# Altium PCB PCB_Germany-M8N_2022-05-04.pcbdoc
Units mil, origin at the board's own origin, x right, y up, seen from the top; angles counter-clockwise.
Board outline 5620 x 3530 mil, 2 copper layers (Top Layer, Bottom Layer); 49 components, 38 nets, 259 pads, 95 vias.
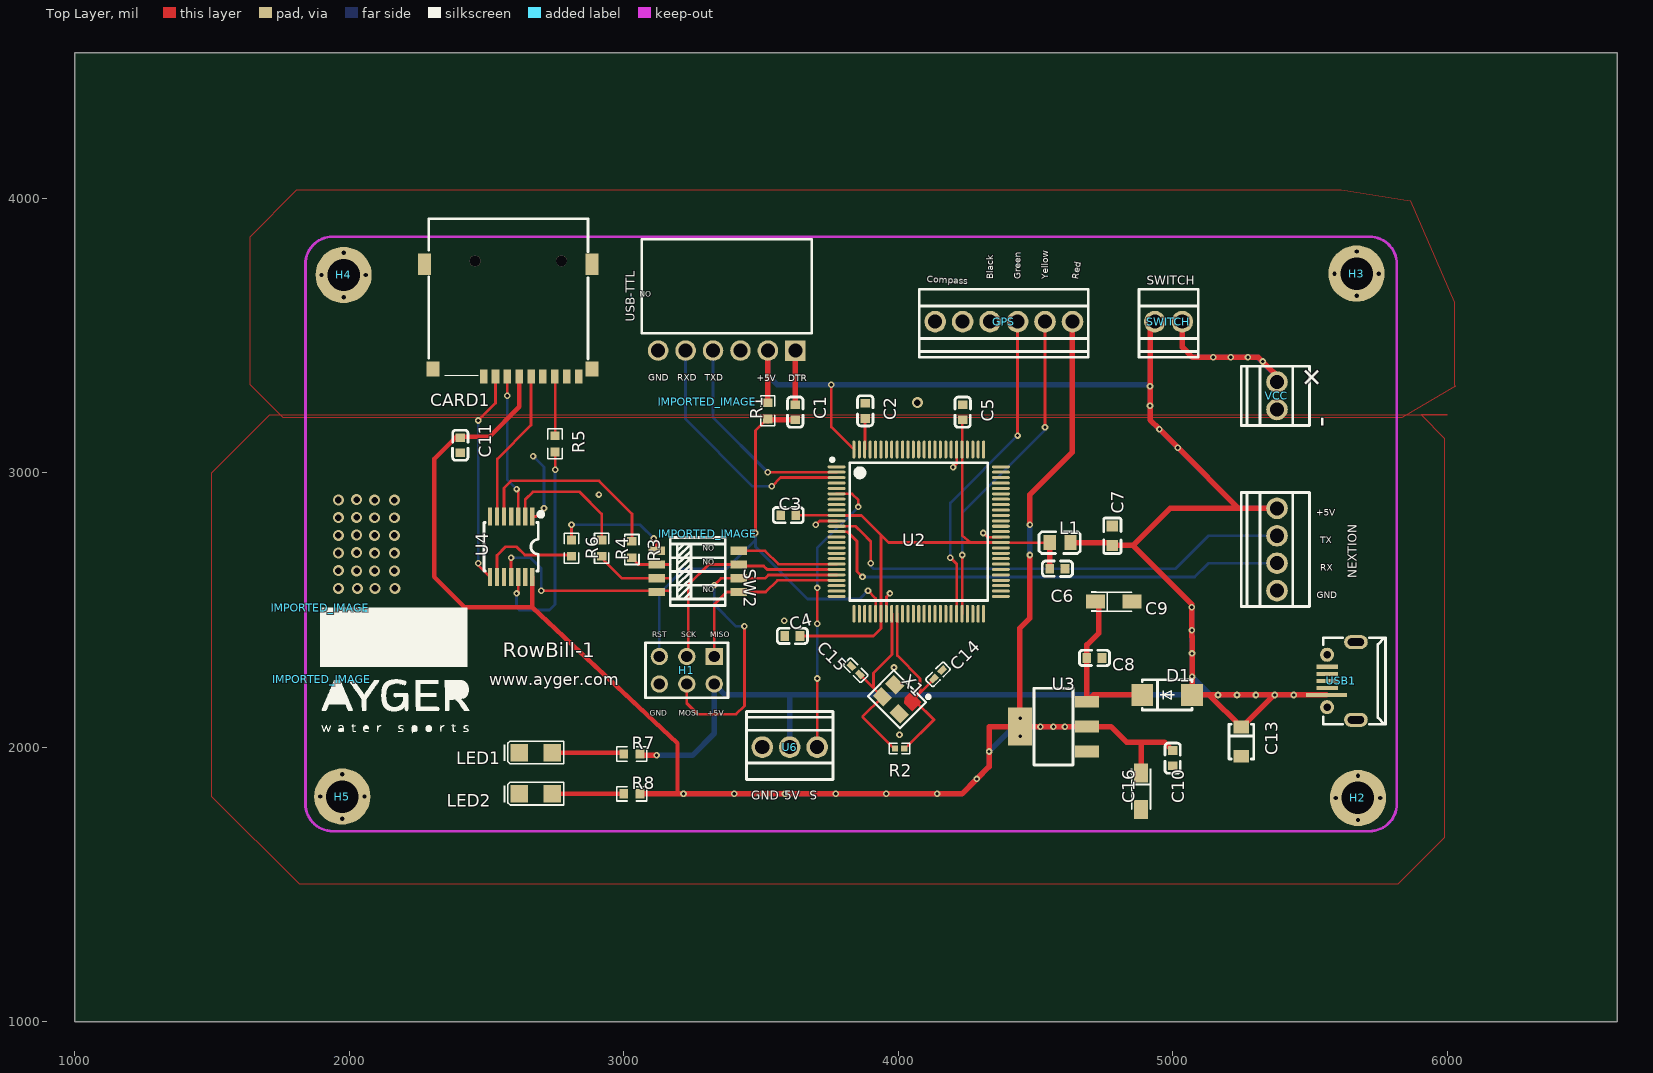
[diagram p0: Top Layer view]
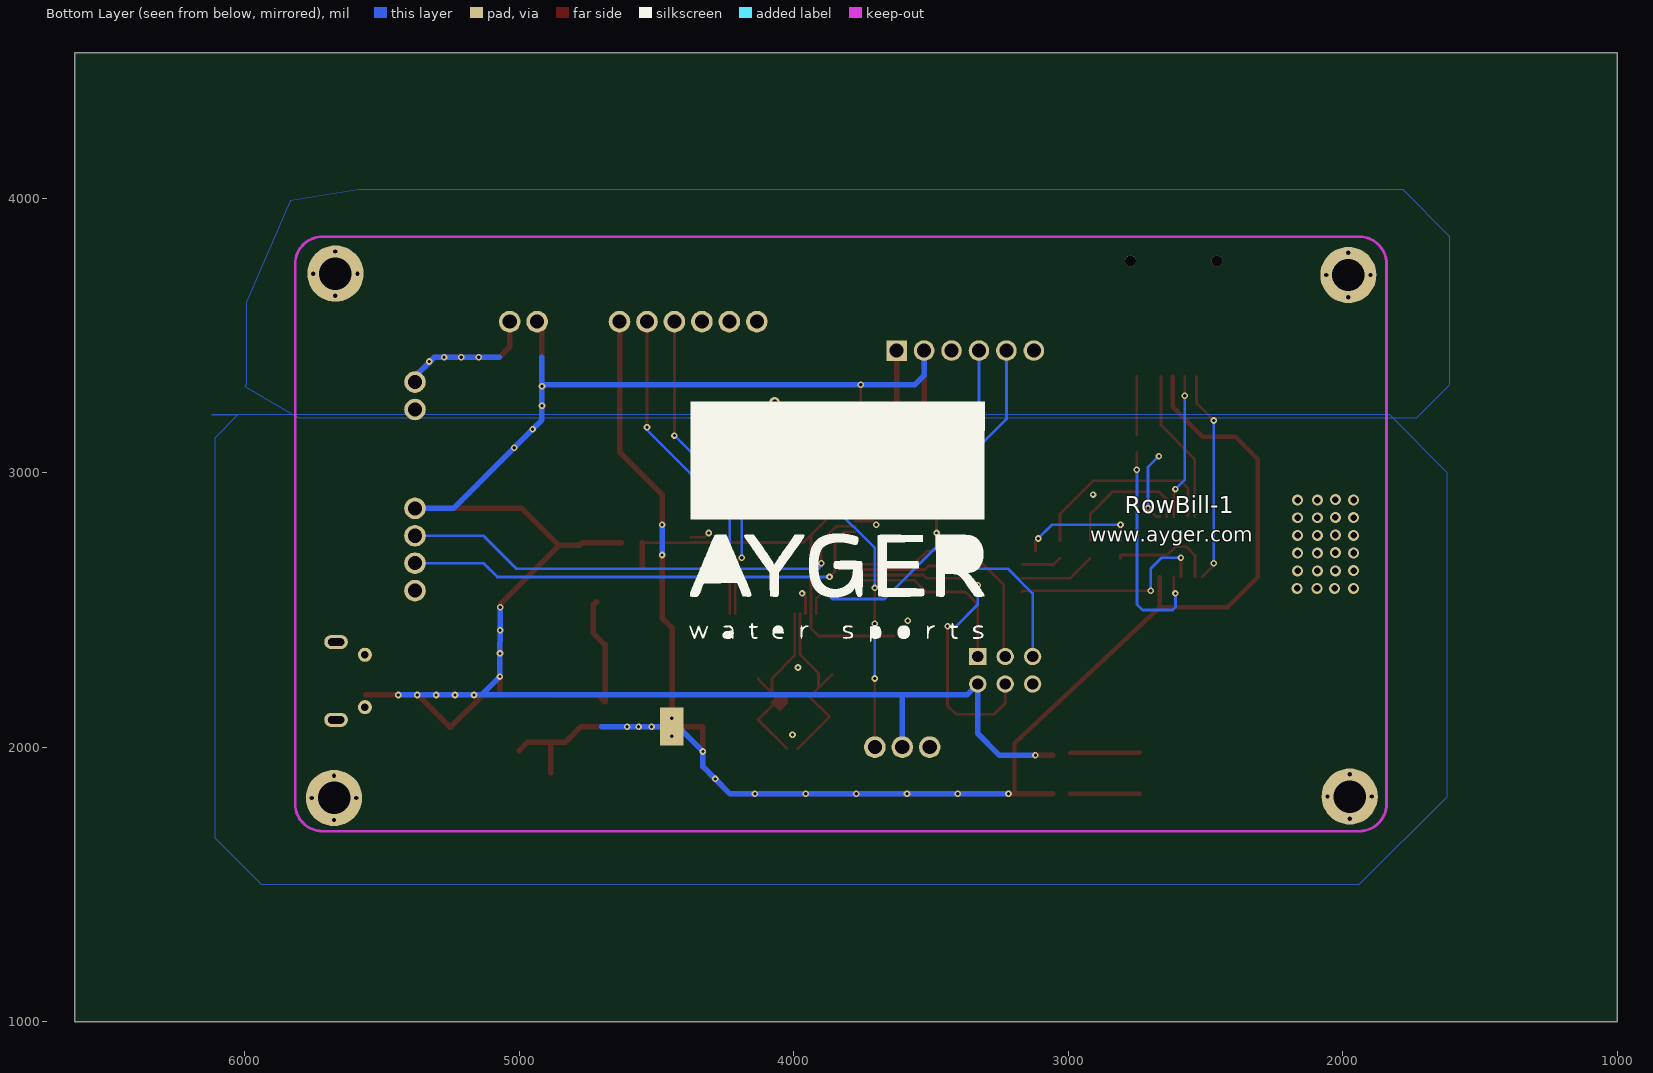
[diagram p1: Bottom Layer view, seen from below]

## Layer stack, top to bottom
Top Layer: signal copper (thickness not stored)
Dielectric: dielectric 12.6, FR-4, Dk 4.8
Bottom Layer: signal copper (thickness not stored)

## Board outline
6620,1000 1000,1000 1000,4530 6620,4530

## Components (designator, comment, footprint, x,y, rotation, side; value= is the part's Value field where it differs from the comment)
C1 "100nF" C0603#1 3625,3220 r270 top
C2 "100nF" C0603#1 3880,3225 r270 top
C3 "100nF" C0603#1 3600,2845 r0 top
C4 "100nF" C0603#1 3615,2405 r0 top
C5 "100nF" C0603#1 4235,3220 r270 top
C6 "100nF" C0603#1 4580,2650 r180 top
C7 "10u" C0603#2 4780,2770 r270 top
C8 "100nF" C0603#1 4715,2325 r180 top
C9 "10uF" CAP-SMD_L3.2-W1.6-R-RD 4785,2530 r180 top
C10 "100nF" C0603#1 5000,1960 r90 top
C11 "100nF" C0603#1 2405,3100 r90 top
C13 "1uF" CAP-SMD_L3.2-W1.6 5250,2020 r270 top
C14 "22pF" C0402 4145,2265 r225 top
C15 "22pF" C0402 3845,2280 r315 top
C16 "22uF" CAP-SMD_L3.2-W1.6-R-RD 4885,1840 r90 top
CARD1 "TF-01A" TF-SMD_TF-01A 2580,3554.97 r180 top
D1 "M7_C95872" DO-214AC_L4.3-W2.7-LS5.3-RD 4980,2190 r0 top
GPS "KF128-2.54-6P" CONN-TH_6P-P2.54_KF128-2.54-6P 4385,3550 r0 top
H1 "A2541WV-2X3P" HDR-TH_6P-P2.54-V-R2-C3-S2.54_A2541WV-2X3P 3230,2280 r180 top
H2 "SCREW HOLE 3MM" ? 5675,1815 r0 top
H3 "SCREW HOLE 3MM" ? 5670,3725 r0 top
H4 "SCREW HOLE 3MM" ? 1980,3720 r0 top
H5 "SCREW HOLE 3MM" ? 1975,1820 r0 top
IMPORTED_IMAGE "IMPORTED_IMAGE" IMPORTED_IMAGE 3305.95,2778.15 r0 top
IMPORTED_IMAGE "IMPORTED_IMAGE" IMPORTED_IMAGE 3305,3259 r0 top
IMPORTED_IMAGE "IMPORTED_IMAGE" IMPORTED_IMAGE 1895,2507.25 r0 top
IMPORTED_IMAGE "IMPORTED_IMAGE" IMPORTED_IMAGE 1900.1,2246.4 r0 top
L1 "BLM21PG220SH1D" L0805 4590,2745 r0 top
LED1 "led Green" LED1206-RD 2680,1980 r0 top
LED2 "led Green" LED1206-RD 2680,1830 r0 top
NEXTION "KF128-2.54-4P" CONN-TH_4P-P2.54_KF128-2.54-4P 5380,2720 r270 top
R1 "10K" R0603 3525,3225 r90 top
R2 "1M" R0402 4005,1995 r180 top
R3 "3.3K" R0603 3030,2720 r270 top
R4 "3.3K" R0603 2920,2725 r270 top
R5 "3.3K" R0603 2750,3105 r270 top
R6 "3.3K" R0603 2810,2725 r270 top
R7 "1K" R0603 3030,1975 r0 top
R8 "1K" R0603 3030,1830 r0 top
SW2 "DHA-04TQ" SW-SMD_8P-L6.3-W4.5-P1.27-LS8.1 3270,2640 r270 top
SWITCH "KF128-2.54-2P" CONN-TH_P2.54_KF128-2.54-2P 4985,3550 r0 top
U2 "ATMEGA2560-16AU" TQFP-100_L14.0-W14.0-P0.50-LS16.0-BL 4075,2785 r270 top
U3 "AMS1117-3.3_C369933" SOT-223_L6.7-W3.5-P2.30-BR 4565.63,2074.72 r0 top
U4 "74LVC125APW,118" TSSOP-14_L5.0-W4.4-P0.65-LS6.4-BL 2590,2730 r180 top
U6 "KF128-2.54-3P" CONN-TH_3P-P2.54_KF128-2.54-3P 3605,2000 r180 top
USB1 "MICROXNJ" MICRO-USB-SMD_MICROXNJ 5615,2241.1 r90 top
USB-TTL "A2541HWR-6P" HDR-TH_6P-P2.54-H-W8.6_A2541HWR-6P 3375.6,3444.7 r180 top
VCC "KF128-2.54-2P" CONN-TH_P2.54_KF128-2.54-2P 5380,3280 r270 top
X1 "16MHz" OSC-SMD_4P-L3.2-W2.5-BL 3995.62,2174.71 r135 top

## Footprints (in the part's own frame and the unit in brackets; to place one, negate y for a bottom-side part, rotate by r counter-clockwise, add the part's x,y. Pads: shape width x height; smd on the part's side, far side on the other; paste and mask are expansions set on the pad)
C0402 [mm]
  rect 0.79x0.54 smd: 1(-0.545,0) 2(0.545,0)
  silkscreen extent -1.17,-0.5 1.17,0.5
C0603#1 [mm]
  rect 0.8x0.9 smd: 1(-0.7,0) 2(0.7,0)
  silkscreen extent -1.41,-0.71 1.39,0.72
C0603#2 [mm]
  rect 1x1.1 smd: 1(-0.9,0) 2(0.9,0)
  silkscreen extent -1.65,-0.8 1.65,0.8
CAP-SMD_L3.2-W1.6 [mm]
  rect 1.2x1.4 smd: 1(-1.35,0) 2(1.35,0)
  silkscreen extent -1.6,-1.14 1.6,1.14
CAP-SMD_L3.2-W1.6-R-RD [mil]
  rect 69.19x51.02 smd: 1(66.39,0) 2(-66.39,0)
  silkscreen extent -66,-37 81,37
CONN-TH_3P-P2.54_KF128-2.54-3P [mm]
  round 2 hole 1.3: 1(-2.54,0) 2(0,0) 3(2.54,0)
  silkscreen extent -4.01,-3.3 4.01,3
CONN-TH_4P-P2.54_KF128-2.54-4P [mm]
  round 2 hole 1.3: 1(-3.81,0) 2(-1.27,0) 3(1.27,0) 4(3.81,0)
  silkscreen extent -5.28,-3.3 5.28,3
CONN-TH_6P-P2.54_KF128-2.54-6P [mm]
  round 2 hole 1.3: 1(-6.35,0) 2(-3.81,0) 3(-1.27,0) 4(1.27,0) 5(3.81,0) 6(6.35,0)
  silkscreen extent -7.82,-3.3 7.82,3
CONN-TH_P2.54_KF128-2.54-2P [mm]
  round 2 hole 1.3: 1(-1.27,0) 2(1.27,0)
  silkscreen extent -2.74,-3.3 2.74,3
DO-214AC_L4.3-W2.7-LS5.3-RD [mm]
  rect 2x2 smd: 1(-2.3,0) 2(2.3,0)
  silkscreen extent -2.3,-1.4 2.3,1.4
HDR-TH_6P-P2.54-H-W8.6_A2541HWR-6P [mm]
  rect 1.9x1.9 hole 1.3: 1(-6.35,0)
  round 1.9 hole 1.3: 2(-3.81,0) 3(-1.27,0) 4(1.27,0) 5(3.81,0) 6(6.35,0)
  silkscreen extent -7.87,-10.3 7.87,-1.6
HDR-TH_6P-P2.54-V-R2-C3-S2.54_A2541WV-2X3P [mm]
  rect 1.6x1.6 hole 1.05: 1(-2.54,-1.27)
  round 1.6 hole 1.05: 2(-2.54,1.27) 3(0,-1.27) 4(0,1.27) 5(2.54,-1.27) 6(2.54,1.27)
  silkscreen extent -3.81,-2.54 3.81,2.54
IMPORTED_IMAGE [mil]
L0805 [mil]
  rect 44.59x54.21 smd: 1(-38.05,0) 2(38.04,0)
  silkscreen extent -77,-40 73,40
LED1206-RD [mm]
  rect 1.635x1.6 smd: 1(-1.517,0) 2(1.517,0)
  silkscreen extent -2.99,-1.04 2.57,1.07
MICRO-USB-SMD_MICROXNJ [mm]
  rect 0.4x2 smd: 1(-1.3,1.327) 2(-0.65,1.327) 3(0,1.327) 4(0.65,1.327) 5(1.3,1.327)
  round 1.3 hole 0.7: 6(2.425,1.335) 9(-2.425,1.335)
  oval 1.3x2.2 hole 0.7 slot 1.5 at 90 deg: 7(3.6,-1.335) 8(-3.6,-1.335)
  silkscreen extent -4,-4.07 4,1.68
OSC-SMD_4P-L3.2-W2.5-BL [mm]
  round 0 smd: 1(-1.1,-0.8)
  rect 1.4x1.15 smd: 2(1.1,-0.8) 3(1.1,0.8) 4(-1.1,0.8)
  Top Layer region: -1.8,-0.225 -0.762,-0.225 -0.4,-0.604 -0.4,-1.375 -1.8,-1.375
  silkscreen extent -2.1,-2.35 2.1,1.7
R0402 [mm]
  rect 0.566x0.54 smd: 1(-0.433,0) 2(0.433,0)
  silkscreen extent -0.94,-0.5 0.94,0.5
R0603 [mil]
  rect 31.75x34.02 smd: 1(-29.66,0) 2(29.66,0)
  silkscreen extent -55,-26 55,26
SOT-223_L6.7-W3.5-P2.30-BR [mm]
  rect 2.2x1.1 smd: 1(3.099,-2.3) 2(3.099,0) 3(3.099,2.3)
  rect 2.2x3.5 smd: 4(-3.099,0)
  silkscreen extent -1.8,-3.55 1.8,3.55
SW-SMD_8P-L6.3-W4.5-P1.27-LS8.1 [mil]
  rect 30x60 smd: 1(-75,-150) 2(-25,-150) 3(25,-150) 4(75,-150) 5(75,150) 6(25,150) 7(-25,150) 8(-75,150)
  silkscreen extent -124,-100 124,100
TF-SMD_TF-01A [mm]
  rect 0.7x1.3 smd: 1(2.292,5.2) 2(1.192,5.198) 3(0.096,5.2) 4(-1.004,5.2) 5(-2.103,5.2) 6(-3.201,5.2) 7(-4.297,5.2) 8(-5.395,5.2) 9(-6.499,5.2)
  rect 1.2x1.397 smd: 10(-7.747,4.502) 13(6.985,4.502)
  rect 1.2x2 smd: 11(-7.747,-5.2) 12(7.747,-5.2)
  round 1 hole 1 unplated: ""(-4.915,-5.49) ""(3.084,-5.487)
  silkscreen extent -7.37,-9.4 7.37,5.14
TQFP-100_L14.0-W14.0-P0.50-LS16.0-BL [mm]
  oval 0.28x1.65 smd: 1(-6,-7.6) 2(-5.5,-7.6) 3(-5,-7.6) 4(-4.5,-7.6) 5(-4,-7.6) 6(-3.5,-7.6) 7(-3,-7.6) 8(-2.5,-7.6) 9(-2,-7.6) 10(-1.5,-7.6) 11(-1,-7.6) 12(-0.5,-7.6) 13(0,-7.6) 14(0.5,-7.6) 15(1,-7.6) 16(1.5,-7.6) 17(2,-7.6) 18(2.5,-7.6) 19(3,-7.6) 20(3.5,-7.6) 21(4,-7.6) 22(4.5,-7.6) 23(5,-7.6) 24(5.5,-7.6) 25(6,-7.6) 51(6,7.6) 52(5.5,7.6) 53(5,7.6) 54(4.5,7.6) 55(4,7.6) 56(3.5,7.6) 57(3,7.6) 58(2.5,7.6) 59(2,7.6) 60(1.5,7.6) 61(1,7.6) 62(0.5,7.6) 63(0,7.6) 64(-0.5,7.6) 65(-1,7.6) 66(-1.5,7.6) 67(-2,7.6) 68(-2.5,7.6) 69(-3,7.6) 70(-3.5,7.6) 71(-4,7.6) 72(-4.5,7.6) 73(-5,7.6) 74(-5.5,7.6) 75(-6,7.6)
  oval 1.65x0.28 smd: 26(7.6,-6) 27(7.6,-5.5) 28(7.6,-5) 29(7.6,-4.5) 30(7.6,-4) 31(7.6,-3.5) 32(7.6,-3) 33(7.6,-2.5) 34(7.6,-2) 35(7.6,-1.5) 36(7.6,-1) 37(7.6,-0.5) 38(7.6,0) 39(7.6,0.5) 40(7.6,1) 41(7.6,1.5) 42(7.6,2) 43(7.6,2.5) 44(7.6,3) 45(7.6,3.5) 46(7.6,4) 47(7.6,4.5) 48(7.6,5) 49(7.6,5.5) 50(7.6,6) 76(-7.6,6) 77(-7.6,5.5) 78(-7.6,5) 79(-7.6,4.5) 80(-7.6,4) 81(-7.6,3.5) 82(-7.6,3) 83(-7.6,2.5) 84(-7.6,2) 85(-7.6,1.5) 86(-7.6,1) 87(-7.6,0.5) 88(-7.6,0) 89(-7.6,-0.5) 90(-7.6,-1) 91(-7.6,-1.5) 92(-7.6,-2) 93(-7.6,-2.5) 94(-7.6,-3) 95(-7.6,-3.5) 96(-7.6,-4) 97(-7.6,-4.5) 98(-7.6,-5) 99(-7.6,-5.5) 100(-7.6,-6)
  silkscreen extent -6.8,-8.15 6.37,6.37
TSSOP-14_L5.0-W4.4-P0.65-LS6.4-BL [mm]
  rect 0.4x1.7 smd: 1(-1.95,-2.8) 2(-1.3,-2.8) 3(-0.65,-2.8) 4(0,-2.8) 5(0.65,-2.8) 6(1.3,-2.8) 7(1.95,-2.8) 8(1.95,2.8) 9(1.3,2.8) 10(0.65,2.8) 11(0,2.8) 12(-0.65,2.8) 13(-1.3,2.8) 14(-1.95,2.8)
  silkscreen extent -2.95,-3.2 2.5,2.25
? [mil]
  round 31.5 hole 15.8: ""(-80.71,0) ""(0,-80.71) ""(0,80.71) ""(80.71,0)
  round 204.72 hole 118.11: ""(0,0)

## Free pads (board coordinates)
  rect 150x15.75 smd: 2(5560,2190)
  rect 86.61x137.79 smd far side: 4(4445,2075)

## Via types
v1: diameter 24, hole 12, Top Layer to Bottom Layer, tented both sides, 70 vias
v2: diameter 40, hole 24, Top Layer to Bottom Layer, tented both sides, 25 vias

## Nets (pads, with @x,y where several pads share a name; then routed paths per layer and width w, separated by ;. In a path a pad name is that pad's centre, name@x,y a point inside that pad or via, vN(x,y) a via of type N, cw(c..) or ccw(c..) an arc to the next point about the centre after c; other vN are vias at no path point)
3.3V: C10.2 C11.2 C16.1 CARD1.4 GPS.6 pad.4 R8.2 U3.2 U3.4 U4.14 | length 7929.9
  Top Layer w16: CARD1.4@2619.5,3350.3 2620,3240 2510,3130 2390,3130 2310,3050 2310,2620 2420,2510 2666.8,2510 ; U4.14 2666.8,2510 ; 2666.8,2543.2 2666.8,2510 ; 3196.33,1830 3196.33,2013.67 2666.8,2510
  Top Layer w20: R8.2@3056.5,1830 v1(3218.18,1830) 3347.12,1830 3552.39,1830 3747.12,1830 3968.18,1830 v1(4141.86,1830) 4232.1,1830 v1(4286.34,1884.19) 4331.1,1928.9 v1(4331.1,1984.03) 4331.1,2074.7 ; 4331.07,2074.72 v1(4518.28,2074.72) v1(4565.63,2074.72) v1(4607.62,2074.72) U3.2 ; U3.4 4443.63,2433.63 4480,2470 v1(4480,2700) ; v1(4480,2810) 4480,2920 4635,3075 GPS.6 ; U3.2 4775.3,2074.7 4832,2018 4915.6,2018 ; C16.1 4885,2016.66 4886.34,2018 4969.56,2018 C10.2
  Bottom Layer w20: v1(3218.18,1830) v1(4141.86,1830) 4232.15,1830 v1(4286.34,1884.19) 4331.1,1928.94 v1(4331.1,1984.03) 4421.79,2074.72 v1(4518.28,2074.72) ; pad.4@4450,2074.72 v1(4607.62,2074.72) 4700,2074.72 ; v1(4480,2700) v1(4480,2810)
  other v1: 3402.91,1830 3587.65,1830 3772.39,1830 3957.13,1830 4445,2040 4445,2105
+5V: C7.2 C13.1 D1.2 H1.2 L1.2 NEXTION.1 pad.2 R1.2 R7.2 SWITCH.1 U2.100 U6.2 USB1.1 USB-TTL.2 | length 9512.3
  Top Layer w10: v1(3756.62,3320) 3756.62,3166.37 U2.100
  Top Layer w20: R7.2@3056.49,1970 v1(3120,1970) ; R1.2 USB-TTL.2 ; L1.2 4769.6,2745 C7.2 ; SWITCH.1 4917.5,3532.5 v1(4917.5,3314.71) v1(4917.5,3243.66) 4917.5,3192.5 v1(4951.76,3158.24) v1(5018.87,3091.13) 5240,2870 NEXTION.1 4990.8,2870 4855.4,2734.6 ; D1.2 v1(5070.6,2257.03) 5070.6,2323.7 5070.6,2401.48 5070,2402.08 v1(5070,2510) 5070,2520 4855.4,2734.6 ; C7.2 4855.4,2734.6 ; C7.2 4855.4,2734.6 ; D1.2 v1(5165.26,2190) 5236.49,2190 5309.26,2190 5387.93,2190 pad.2 v1(5441.26,2190) 5370,2190 5253.15,2073.15 C13.1 5133.15,2190 D1.2
  Bottom Layer w20: v1(3120,1970) 3250,1970 3330,2050 H1.2 3370,2190 5190,2190 v1@5230,2190 ; USB-TTL.2 3525.6,3354.4 3560,3320 4912.21,3320 v1(4917.5,3314.71) ; U6.2@3605,2005 3605,2186.17 3608.83,2190 ; 4917.5,3420 4917.5,3192.5 5240,2870 NEXTION.1 ; v1(5070,2510) v1(5070.6,2257.03) ; v1(5070.6,2257.03) 5137.64,2190 v1(5165.26,2190) ; v1(5234.26,2190) v1(5441.26,2190)
  other v1: 5303.27,2190 5372.27,2190 5070.4,2341.35 5070.2,2425.68
AREF1: C2.2 U2.98 | length 111.1
  Top Layer w10: U2.98@3878.78,3083.93 3878.78,3193.35 C2.2@3880,3194.57
CRYSTAL_1: C14.2 R2.1 U2.34 X1.1 | length 741.2
  Top Layer w10: U2.34@3996.89,2485.51 3996.89,2333.11 4080,2250 4080,2197.84 X1.1 ; R2.1@4027.13,1994.72 4027.13,1996.22 4130.58,2099.67 4063.89,2166.36 X1.1 ; C14.2 4129.83,2247.67 X1.1
CRYSTAL_2: C15.2 R2.2 U2.33 X1.3 | length 726.1
  Top Layer w10: C15.2 3860.97,2264.82 X1.3 ; 3870.69,2109.67 3870.69,2111.02 X1.3 ; 3870.7,2109.7 R2.2@3985.6,1994.7 ; U2.33@3977.2,2485.51 3977.2,2337.2 3910,2270 3910,2215.79 X1.3
CS_I: R6.1 SW2.1 | length 428.4
  Top Layer w10: R6.1@2810,2751.49 v1(2810,2810) ; v1(3110,2760) 3120,2750 SW2.1
  Bottom Layer w10: v1(2810,2810) 3060,2810 v1(3110,2760)
CS_INPUT: SW2.8 U2.19 | length 385.4
  Top Layer w10: SW2.8@3411.06,2715 3515,2715 3563.39,2666.61 U2.19@3776.42,2666.61
CS_O: CARD1.2 U4.8 | length 774.6
  Top Layer w10: v1(2470,2670) 2470,2662.99 U4.8 ; v1(2470,3190) 2533.07,3253.07 CARD1.2
  Bottom Layer w10: v1(2470,2670) v1(2470,3190)
DTR: C1.1 USB-TTL.1 | length 197.4
  Top Layer w20: C1.1 3625,3444.1 USB-TTL.1
GND: C2.1 C3.1 C4.1 C5.1 C6.1 C7.1 C8.1 C9.2 C10.1 C11.1 C13.2 C14.1 C15.1 C16.2 CARD1.6 CARD1.10 CARD1.11 CARD1.12 CARD1.13 GPS.3 H1.6 LED1.1 LED2.1 NEXTION.4 U2.11 U2.32 U2.62 U2.81 U2.99 U3.1 U4.1 U4.4 U4.7 U4.10 U4.13 U6.3 USB1.5 USB1.6 USB1.7 USB1.8 USB1.9 USB-TTL.6 VCC.2 X1.2 X1.4 | length 564.6
  Top Layer w10: U4.1 2680.24,2840.24 v1(2710,2870) ; v1(3700,2810) 3714.09,2824.09 U2.11@3776.42,2824.09 ; U2.32@3957.52,2485.51 3957.52,2547.52 v1(3970,2560) ; v1(4200,3020) 4213.43,3033.43 U2.81@4213.43,3083.93 ; v1(4310,2780) 4324.97,2765.03 U2.62@4374.84,2765.03
  Bottom Layer w10: v1(2670,3060) 2710,3020 v1(2710,2870)
  other v1: 4005,2045 3985,2290 3585,2460 2910,2920
  other v2: 1961.03,2578.34 2029.96,2578.34 2094.36,2578.34 2166.57,2578.34 2027.46,2642.42 2093.11,2642.42 2165,2642.42 1961.03,2642.73 1961.03,2707.13 2093.11,2706.82 2165,2706.82 2027.46,2708.32 2093.1,2771.21 2165,2771.21 1961.03,2771.52 2027.46,2772.72 1961.03,2835.92 2093.11,2835.61 2165,2835.61 2027.46,2837.11 1961.03,2900.31 2093.1,2900 2165,2900 2027.46,2901.51 4070,3255
GPS_1: GPS.4 U2.45 | length 1175.7
  Top Layer w10: v1(4190,2690) 4213.43,2666.57 4213.43,2660 U2.45@4213.43,2485.51 ; v1(4435,3135) GPS.4
  Bottom Layer w10: v1(4190,2690) 4190,2890 v1(4435,3135)
GPS_2: GPS.5 U2.46 | length 1189.5
  Top Layer w10: U2.46@4233.11,2485.51 v1(4233.11,2700) ; v1(4535,3165) GPS.5
  Bottom Layer w10: v1(4233.11,2700) 4233.11,2853.11 4535,3155 v1(4535,3165)
HALL_EFFECT: U2.6 U6.1 | length 1050.8
  Top Layer w10: U6.1 v1(3705,2250) ; v1(3705,2450) v1(3705,2580) ; U2.6 3832.2,2922.8 3855,2900 v1(3855,2875)
  Bottom Layer w10: v1(3705,2250) v1(3705,2450) ; v1(3705,2580) 3705,2725 v1(3855,2875)
LED1_2: LED1.2 R7.1 | length 253.8
  Top Layer w16: LED1.2 R7.1@2993.5,1980
LED2_2: LED2.2 R8.1 | length 253.8
  Top Layer w16: LED2.2 R8.1@2993.5,1830
MISO_I: SW2.4 U4.11 | length 747.8
  Top Layer w10: U4.11 v1(2590,2690) ; v1(2700,2570) 3163.94,2570 3168.94,2565
  Bottom Layer w10: v1(2590,2690) 2660,2690 2700,2650 v1(2700,2570)
MISO_INPUT: H1.1 SW2.5 U2.22 | length 662.7
  Top Layer w10: H1.1@3330,2340 3330,2520 3375,2565 3411.06,2565 3517.45,2565 3560,2607.55 U2.22@3776.42,2607.55
MISO_O: CARD1.7 R5.1 | length 214.6
  Top Layer w10: CARD1.7@2749.19,3350.27 2750.63,3348.83 R5.1@2750.63,3136.22
MOSI_I: R4.2 SW2.3 | length 279.4
  Top Layer w10: R4.2@2920,2688.51 2993.51,2615 3168.94,2615
MOSI_INPUT: H1.4 SW2.6 U2.21 | length 1283.9
  Top Layer w10: H1.4@3230,2240 3230,2160 3270,2120 3410,2120 3440,2150 v1(3440,2440) ; v1(3330,2590) 3355,2615 3411.06,2615 3515,2615 3527.2,2627.2 U2.21@3776.4,2627.2
  Bottom Layer w10: v1(3330,2590) 3330,2520 3410,2440 v1(3440,2440)
MOSI_O: CARD1.3 U4.3 | length 526.3
  Top Layer w10: v1(2576.24,3280) CARD1.3@2576.24,3350.27 ; v1(2610,2940) 2615.59,2934.41 U4.3
  Bottom Layer w10: v1(2576.24,3280) 2576.24,2973.76 v1(2610,2940)
NEXTIONRX: NEXTION.3 U2.13 | length 1757
  Top Layer w10: U2.13@3776.42,2784.72 3815.28,2784.72 3850,2750 3850,2640 v1(3870,2620)
  Bottom Layer w10: v1(3870,2620) 5080,2620 5130,2670 NEXTION.3
NEXTIONTX: NEXTION.2 U2.12 | length 1770
  Top Layer w10: U2.12@3776.42,2804.4 3845.6,2804.4 3870,2780 3900,2750 v1(3900,2670)
  Bottom Layer w10: v1(3900,2670) 3900,2660 3910,2650 5010,2650 5130,2770 NEXTION.2
RST: C1.2 H1.5 R1.1 U2.30 | length 1861.7
  Top Layer w10: v1(3480,2780) 3480,3152.88 R1.1@3525.63,3198.51 ; v1(3890,2570) 3918.15,2541.85 U2.30@3918.15,2485.51
  Top Layer w20: R1.1@3525.63,3188.51 3529.56,3192.44 C1.2
  Bottom Layer w10: H1.5@3130,2340 3130,2560 3220,2650 3375.35,2650 3480,2754.66 v1(3480,2780) 3480,2730 3670,2540 3860,2540 v1(3890,2570)
RXF: U2.3 USB-TTL.5 | length 915.4
  Top Layer w10: v1(3540,2950) 3571.85,2981.85 U2.3
  Bottom Layer w10: USB-TTL.5 3225,3444.1 3225,3195 3470,2950 v1(3540,2950)
S$51: 
S$53: 
SCK_I: R3.2 SW2.2 | length 148.7
  Top Layer w10: R3.2@3030,2688.51 3053.51,2665 3168.94,2665
SCK_INPUT: H1.3 SW2.7 U2.20 | length 845
  Top Layer w10: H1.3 3235,2330 3235,2590 3310,2665 SW2.7@3411.1,2665 ; SW2.7@3411.06,2665 3416.06,2660 3510,2660 3523.08,2646.92 U2.20@3776.42,2646.92
SCK_O: CARD1.5 U4.6 | length 561.4
  Top Layer w10: U4.6 2540,2841.42 2540,3050 2662.78,3172.78 CARD1.5@2662.78,3350.27
TXF: U2.2 USB-TTL.4 | length 776.4
  Top Layer w10: v1(3525,3001.54) U2.2
  Bottom Layer w10: USB-TTL.4 3325.6,3201.5 v1(3525,3001.54)
U2_31: C3.2 C4.2 C5.2 C6.2 L1.1 U2.10 U2.31 U2.61 U2.80 | length 2173.2
  Top Layer w10: C3.2@3631.1,2844.7 3776.4,2843.8 3866.2,2843.8 3937.8,2772.2 ; C4.2@3635.4,2404.7 3744,2404.7 3910.4,2404.7 3937.8,2432.2 3937.8,2485.5 3937.8,2772.2 ; U2.80@4233.1,3083.9 4233.1,2771 4263.33,2745.3 ; U2.80@4233.11,3083.93 4233.11,3192.67 C5.2@4235,3194.56 ; U2.61@4372.3,2745.3 4372.6,2745 L1.1 ; U2.61@4374.8,2745.3 3964.6,2745.3 3937.8,2772.2
  Top Layer w20: C6.2@4550.2,2654.7 4551.96,2656.46 L1.1
U3_3: C8.2 C9.1 D1.1 U3.3 | length 599.2
  Top Layer w20: C9.1 4730.24,2518.37 4730.24,2414.72 4687.63,2372.11 U3.3 4712.35,2190 D1.1
U4_2: R4.1 U4.2 | length 483.3
  Top Layer w10: U4.2 2641.18,2901.18 2670,2930 2840,2930 2920,2850 R4.1@2920,2751.49
U4_5: R3.1 U4.5 | length 728.6
  Top Layer w10: U4.5 2564.41,2944.41 2590,2970 2910,2970 3030,2850 R3.1@3030,2751.49
U4_9: R6.2 U4.9 | length 387
  Top Layer w10: U4.9 2538.8,2698.8 2570,2730 2610,2730 2640,2700 2810,2700 R6.2@2810,2688.5
U4_12: R5.2 U4.12 | length 818
  Top Layer w10: v1(2610,2560) 2615.59,2565.59 U4.12 ; v1(2750.63,3010) R5.2@2750.63,3073.22
  Bottom Layer w10: v1(2610,2560) 2610,2510 2620,2500 2730,2500 2750,2520 2750,3009.37 v1(2750.63,3010)
VCC: SWITCH.2 VCC.1 | length 880.9
  Top Layer w20: SWITCH.2 5035,3457.5 5072.5,3420 v1(5147.5,3420) v1(5211.5,3420) v1(5274.17,3420) ; v1(5274.17,3420) 5312.5,3420 v1(5327.79,3404.71) 5397.5,3335 VCC.1@5405,3335
  Bottom Layer w20: 5072.5,3420 5310,3420 5395,3335 VCC.1@5405,3335
pads on no net: CARD1. CARD1.1 CARD1.8 CARD1.9 GPS.1 GPS.2 H2. H3. H4. H5. U2.1 U2.4 U2.5 U2.7 U2.8 U2.9 U2.14 U2.15 U2.16 U2.17 U2.18 U2.23 U2.24 U2.25 U2.26 U2.27 U2.28 U2.29 U2.35 U2.36 U2.37 U2.38 U2.39 U2.40 U2.41 U2.42 U2.43 U2.44 U2.47 U2.48 U2.49 U2.50 U2.51 U2.52 U2.53 U2.54 U2.55 U2.56 U2.57 U2.58 U2.59 U2.60 U2.63 U2.64 U2.65 U2.66 U2.67 U2.68 U2.69 U2.70 U2.71 U2.72 U2.73 U2.74 U2.75 U2.76 U2.77 U2.78 U2.79 U2.82 U2.83 U2.84 U2.85 U2.86 U2.87 U2.88 U2.89 U2.90 U2.91 U2.92 U2.93 U2.94 U2.95 U2.96 U2.97 USB1.2 USB1.3 USB1.4 USB-TTL.3

## Polygon pours and split planes (outlines as drawn)
GND on Bottom Layer (solid): 1620,1820 1620,3000 1830,3210 6025,3210 6120,3210 6025,3210 6110,3125 6110,1670 5940,1500 1940,1500 1620,1820
GND on Bottom Layer (solid): 5805,3200 1730,3200 1610,3320 1610,3860 1780,4030 5585,4030 5835,3990 5995,3620 5995,3320 6000,3315
GND on Top Layer (solid): 1500,1820 1500,3000 1710,3210 5905,3210 6000,3210 5905,3210 5990,3125 5990,1670 5820,1500 1820,1500 1500,1820
GND on Top Layer (solid): 5835,3200 1760,3200 1640,3320 1640,3860 1810,4030 5615,4030 5865,3990 6025,3620 6025,3320 6030,3315

## Keep-outs
Keep-Out Layer:
  lines w10: 1840.63,1793.72 ccw(c1940.63,1793.72) 1940.63,1693.72 ; 1840.63,3759.72 cw(c1940.63,3759.72) 1940.63,3859.72 ; 5716.63,1693.72 ccw(c5716.63,1793.72) 5816.63,1793.72 ; 5716.63,3859.72 cw(c5716.63,3759.72) 5816.63,3759.72

## Silkscreen, mask and mechanical layers (free items; w line width, h text height)
Top Overlay:
  text "Black" at 4347,3705 h24 r90
  text "Green" at 4447,3705 h24 r90
  text "Yellow" at 4547,3705 h24 r90
  text "Red" at 4656.82,3702.92 h24 r80
  text "Compass" at 4104.37,3693.02 h24 r357
  text "SWITCH" at 4905,3684 h32
  text "+" at 5563.28,3338.28 h80 r135
  text "GND" at 3090,3334.25 h24
  text "RXD" at 3195,3334.25 h24
  text "TXD" at 3295,3334.25 h24
  text "+5V" at 3485,3333 h24
  text "DTR" at 3600,3333 h24
  text "-" at 5575,3165 h80 r90
  text "+5V" at 5522.25,2843 h24
  text "TX" at 5536.8,2743 h24
  text "RX" at 5536.8,2643 h24
  text "GND" at 5525,2543 h24
  text "RST" at 3105,2400 h20
  text "SCK" at 3210,2400 h20
  text "MISO" at 3315,2400 h20
  text "RowBill-1" at 2560,2310 h90
  text "www.ayger.com" at 2510,2210 h72
  text "GND" at 3095,2115 h20
  text "MOSI" at 3200,2115 h20
  text "+5V" at 3305,2115 h20
  text "S" at 3705,1841 h32 r180
  text "GND" at 3465,1809 h32
  text "5V" at 3585,1809 h32
Bottom Overlay:
  text "RowBill-1" at 2795,2830 h108
  text "www.ayger.com" at 2920,2730 h90

## Text inside footprints (layer, text, board x,y; h text height)
SW2: Top Overlay "ON" at 3100,3660 h20 r180; Top Overlay "ON" at 3330,2585 h20 r180; Top Overlay "ON" at 3330,2685 h20 r180; Top Overlay "ON" at 3330,2735 h20 r180